# Altium PCB GRLV_Double_30v_v0.2b.PcbDoc
Units mil, origin at the board's own origin, x right, y up, seen from the top; angles counter-clockwise.
Board outline 4340 x 4860 mil, 2 copper layers (Top Layer, Bottom Layer); 84 components, 43 nets, 212 pads, 4 vias.
Unrouted connection lines stored in the file: 47.
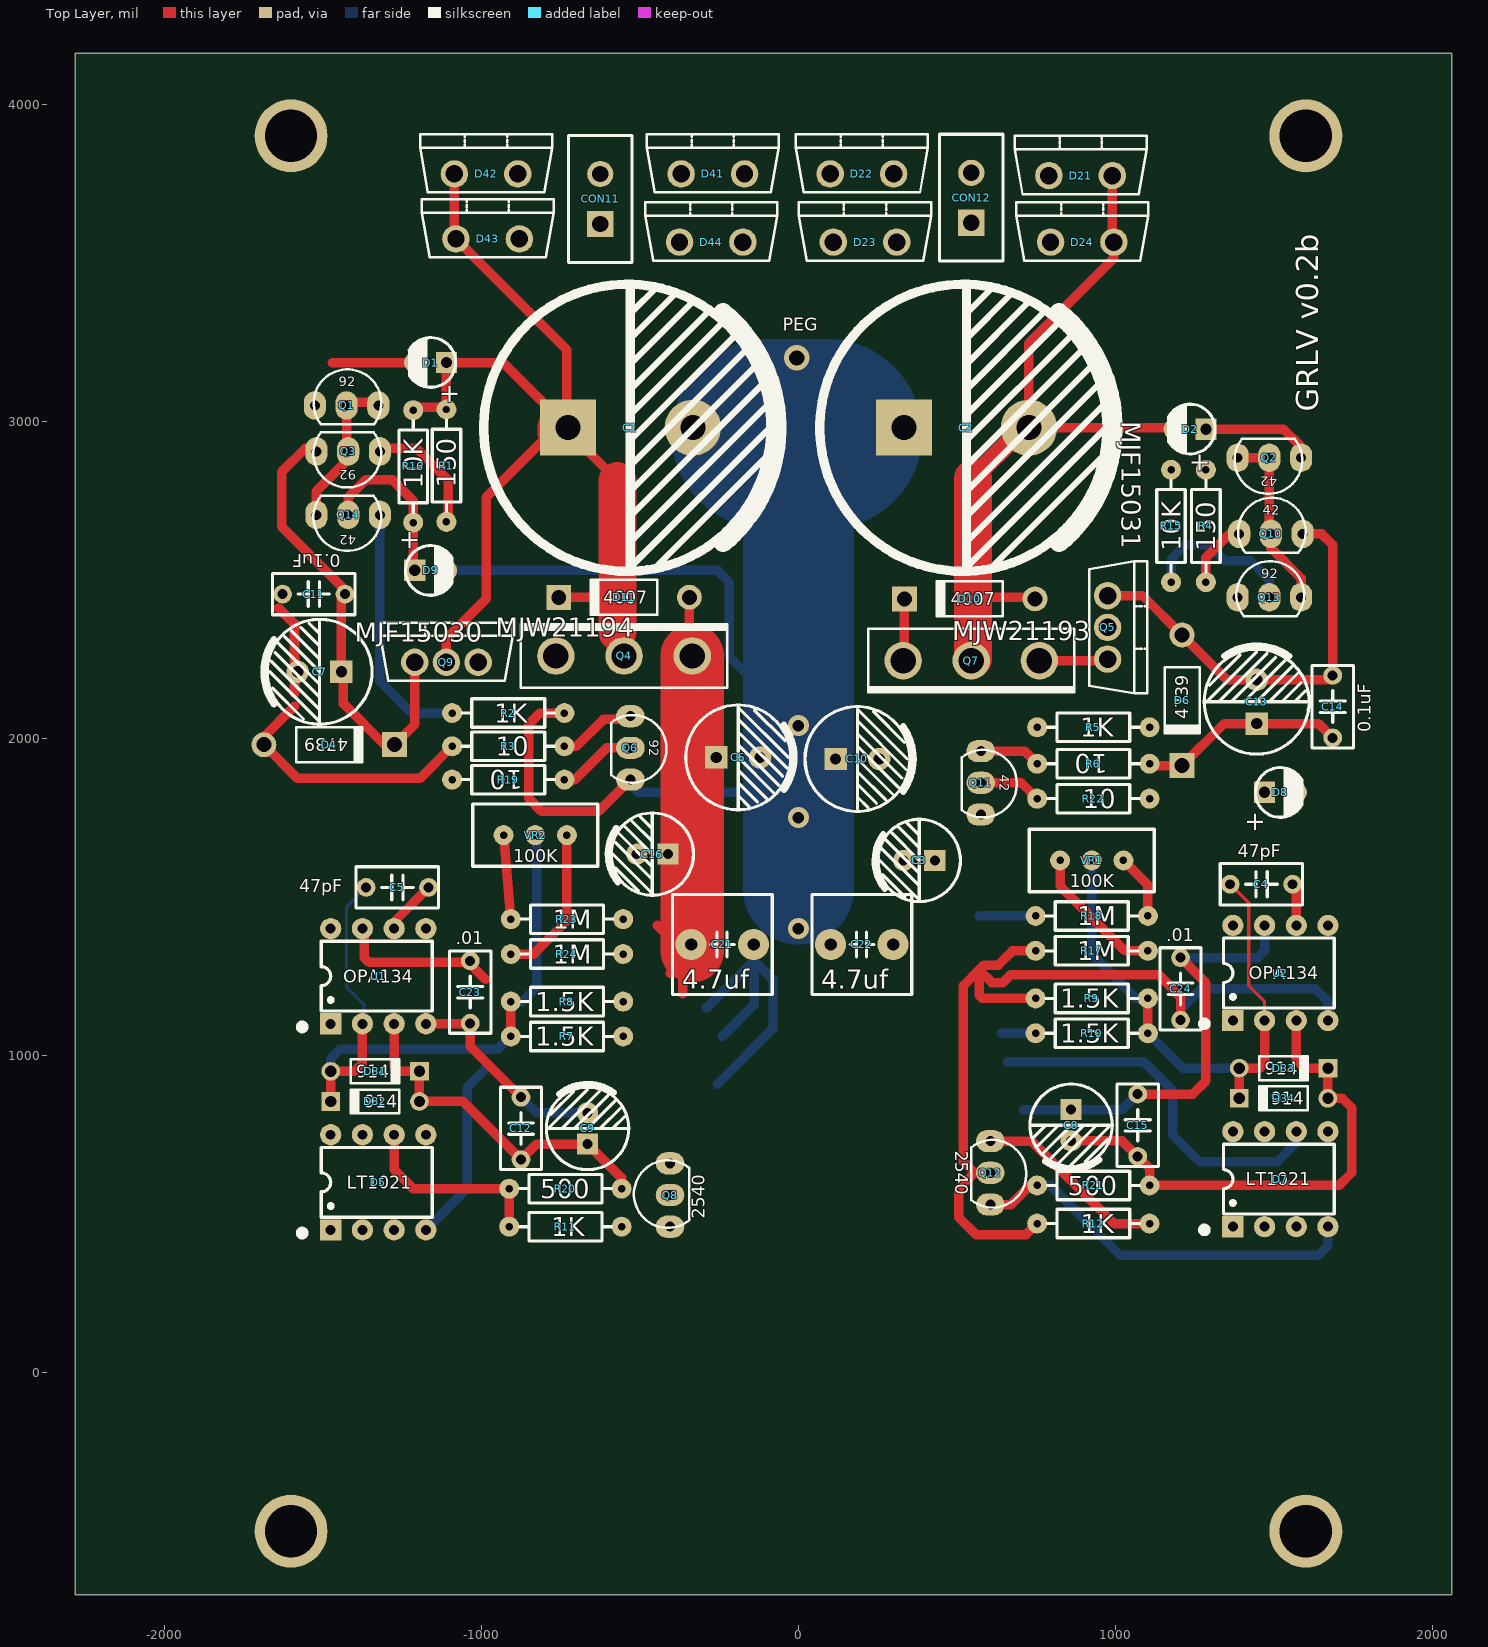
[diagram p0: Top Layer view]
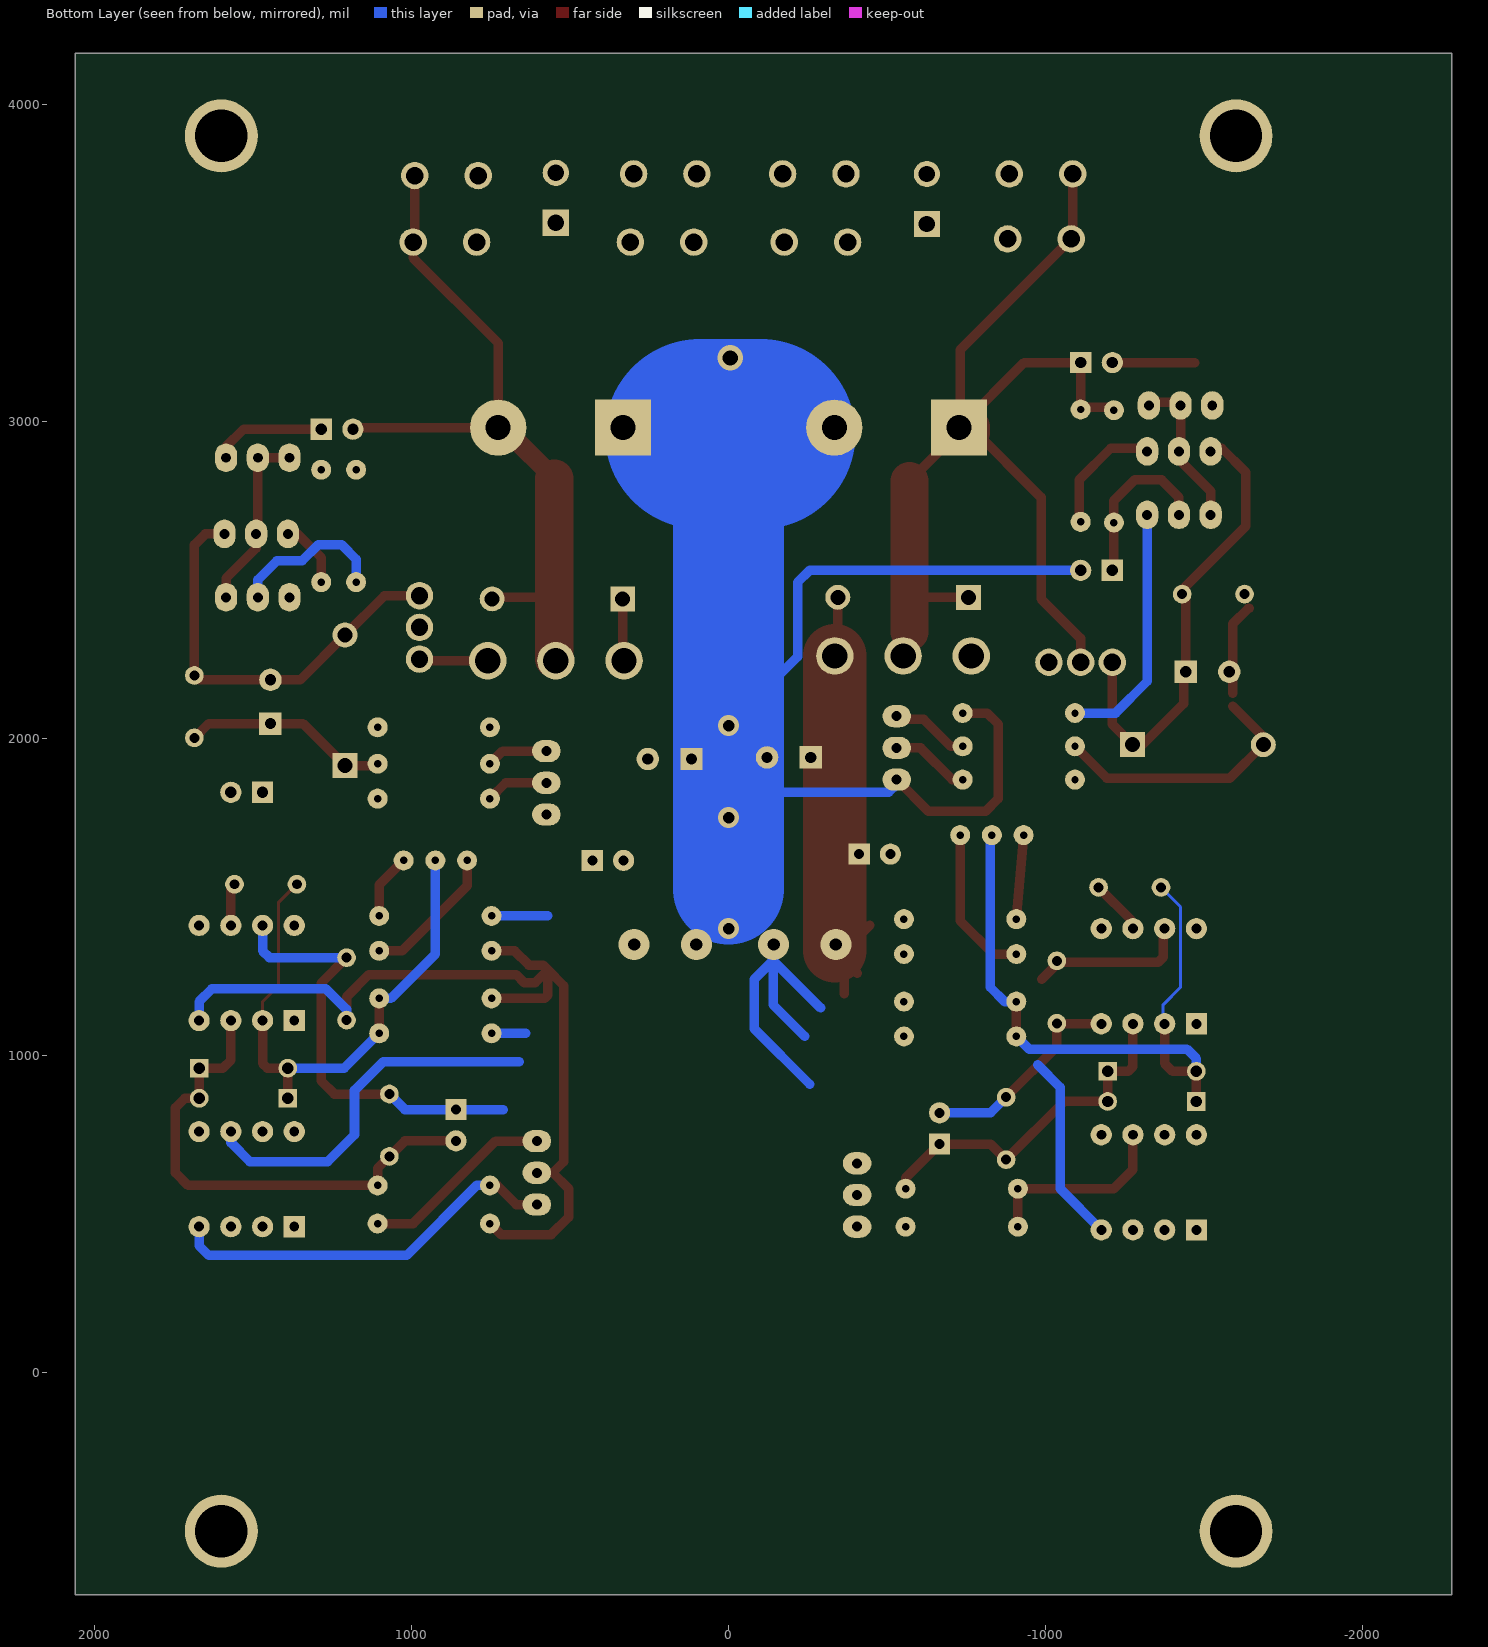
[diagram p1: Bottom Layer view, seen from below]

## Layer stack, top to bottom
Top Solder: solder mask 0.4, Solder Resist, Dk 3.5
Top Layer: signal copper 2.8
Dielectric 1: dielectric 12.6, FR-4, Dk 4.8
Bottom Layer: signal copper 2.8
Bottom Solder: solder mask 0.4, Solder Resist, Dk 3.5

## Board outline
-2280,-700 2060,-700 2060,4160 -2280,4160

## Design rules (kind name [scope] priority, off if disabled: settings)
Clearance [All] p1: gap=10 ignorepadtopadclearanceinfootprint=FALSE except(0: Arc-Hole Track-Hole SMDPad-Hole THPad-Hole Via-Hole Fill-Hole Poly-Hole Region-Hole Text-Hole)
PlaneClearance [All] p1: clearance=30
PlaneConnect [All] p1: planeconnectstyle=Relief reliefexpansion=20 reliefentries=4 reliefconductorwidth=20 reliefairgap=30
PolygonConnect [All] p1: thpad.connectstyle=Relief thpad.reliefconductorwidth=20 thpad.reliefentries=4 thpad.polygonreliefangle="45 Angle" thpad.airgapwidth=20 smdpad.connectstyle=Relief smdpad.reliefconductorwidth=20 smdpad.reliefentries=4 smdpad.polygonreliefangle="90 Angle" smdpad.airgapwidth=20 via.connectstyle=Relief via.reliefconductorwidth=20 via.reliefentries=4 via.polygonreliefangle="45 Angle" via.airgapwidth=20
RoomDefinition GRLV_double_30v_v0.2b [InComponentClass('GRLV_double_30v_v0.2b')] p1: confinementstyle=ConfineIn formatcopy=TRUE lockcomponents=FALSE outline -3835,-1602.83 -1835,-1602.83 -1835,-602.83 -3835,-602.83
RoutingVias [All] p1: holewidth=28 width=50 viastyle="Through Hole" minholewidth=28 minwidth=50 maxholewidth=28 maxwidth=50
SolderMaskExpansion [All] p1: expansion=4
Width [All] p1: maxlimit=700 minlimit=10 preferedwidth=30
28 further rules are at their usual default settings.

## Components (designator, comment, footprint, x,y, rotation, side; value= is the part's Value field where it differs from the comment)
C1 "4700UF/35V" "CAP 10*22*31.5" -530,2980 r0 top
C2 "4700UF/35V" "CAP 10*22*31.5" 530,2980 r0 top
C3 "10UF" "CAP 2.5*6.3*7" 380.79,1615 r180 top
C4 "47pF" "CBB 6.3*6.3*5" 1460,1540 r180 top
C5 "47pF" "CBB 6.3*6.3*5" -1265,1530 r180 top
C6 "220UF/35V" "CAP 3.5*8*11.5" -190,1940 r0 top
C7 "47UF" "CAP 3.5*8*11.5" -1510,2210 r180 top
C8 "47UF" "CAP 2.5*6.3*11.2" 860,780 r270 top
C9 "47UF" "CAP 2.5*6.3*11.2" -665,770 r90 top
C10 "220UF/35V" "CAP 3.5*8*11.5" 186.1,1935 r0 top
C11 "0.1uF" "CBB 6.3*6.3*5" -1528.43,2455 r180 top
C12 "0.1uF" "CBB 6.3*6.3*5" -875,770 r90 top
C13 "47UF" "CAP 3.5*8*11.5" 1445,2115.79 r90 top
C14 "0.1uF" "CBB 6.3*6.3*5" 1685,2100 r90 top
C15 "0.1uF" "CBB 6.3*6.3*5" 1070,780 r90 top
C16 "10UF" "CAP 2.5*6.3*7" -460.79,1635 r180 top
C21 "4.7uf" "CBB 7.2*7.2*13" -240,1350 r0 top
C22 "4.7uf" "CBB 7.2*7.2*13" 200,1350 r0 top
C23 ".01" "CBB 6.3*6.3*5" -1035,1200 r90 top value=0.01uF
C24 ".01" "CBB 6.3*6.3*5" 1205,1210 r270 top value=0.01uF
CON11 "AC220-2" HX4.0-2XS -625,3701.26 r90 top
CON12 "AC220-2" HX4.0-2XS 545,3705 r90 top
D1 "+" "LED 3MM-R" -1160,3185 r180 top
D2 "+" "LED 3MM-R" 1235,2975 r180 top
D4 "4739" DO-41 -1480,1980 r0 top
D5 "LT1021" DIP8-300_MH -1325,600 r90 top
D6 "4739" DO-41 1210,2120 r270 top
D7 "LT1021" DIP8-300_MH 1520,610 r90 top
D8 "+" "LED 3MM-R" 1520,1830 r0 top
D9 "+" "LED 3MM-R" -1160,2530 r0 top
D10 "4007" DO-41 540,2440 r180 top
D11 "4007" DO-41 -550,2445 r180 top
D21 "HFA08" TO220AC 790,3775 r0 top
D22 "HFA08" TO220AC 100,3780 r0 top
D23 "HFA08" TO220AC 110,3565 r0 top
D24 "HFA08" TO220AC 795,3565 r0 top
D31 "914" DO-35 -1335,950 r0 top
D32 "914" DO-35 -1335,855 r180 top
D33 "914" DO-35 1530,960 r0 top
D34 "914" DO-35 1530,865 r180 top
D41 "VS-HFA08TB60-M3" TO220AC -370,3780 r0 top
D42 "VS-HFA08TB60-M3" TO220AC -1085,3780 r0 top
D43 "VS-HFA08TB60-M3" TO220AC -1080,3575 r0 top
D44 "VS-HFA08TB60-M3" TO220AC -375,3565 r0 top
Q1 "92" TO92A -1525,3050 r90 top
Q2 "42" TO92A 1585,2885 r270 top
Q3 "92" TO92A -1320,2905 r270 top
Q4 "MJW21194" TO247V -765,2260 r0 top
Q5 "MJF15031" TO220V 975,2450 r270 top
Q6 "92" TO92A -530,2070 r0 top
Q7 "MJW21193" TO247V 760,2245 r180 top
Q8 "2540" TO92A -405,460 r180 top
Q9 "MJF15030" TO220V -1210,2240 r0 top
Q10 "42" TO92A 1390,2645 r90 top
Q11 "42" TO92A 575,1960 r0 top
Q12 "2540" TO92A 605,730 r0 top
Q13 "92" TO92A 1385,2445 r90 top
Q14 "42" TO92A -1320,2705 r270 top
R1 "150" "RS 1/4W" -1110,2860 r270 top
R2 "1K" "RS 1/4W" -915,2080 r0 top
R3 "10" "RS 1/4W" -915,1975 r0 top
R4 "150" "RS 1/4W" 1285,2670 r90 top
R5 "1K" "RS 1/4W" 930,2035 r0 top
R6 "10" "RS 1/4W" 930,1920 r0 top
R7 "1.5K" "RS 1/4W" -730,1060 r0 top
R8 "1.5K" "RS 1/4W" -730,1170 r180 top
R9 "1.5K" "RS 1/4W" 925,1180 r180 top
R10 "1.5K" "RS 1/4W" 925,1070 r0 top
R11 "1K" "RS 1/4W" -735,460 r180 top
R12 "1K" "RS 1/4W" 930,470 r180 top
R15 "10K" "RS 1/4W" 1175,2670 r90 top
R16 "10K" "RS 1/4W" -1215,2857.83 r270 top
R17 "1M" "RS 1/4W" 925,1330 r180 top
R18 "1M" "RS 1/4W" 925,1440 r0 top
R19 "10" "RS 1/4W" -915,1870 r180 top
R20 "500" "RS 1/4W" -735,580 r180 top
R21 "500" "RS 1/4W" 930,590 r180 top
R22 "10" "RS 1/4W" 930,1810 r0 top
R23 "1M" "RS 1/4W" -730,1430 r0 top
R24 "1M" "RS 1/4W" -730,1320 r180 top
U1 "OPA134" DIP8-300_MH -1325,1250 r90 top
U2 "OPA134" DIP8-300_MH 1520,1260 r90 top
VR1 "100K" "RS 1/2W-VR" 925,1615 r180 top
VR2 "100K" "RS 1/2W-VR" -830,1695 r180 top

## Footprints (in the part's own frame and the unit in brackets; to place one, negate y for a bottom-side part, rotate by r counter-clockwise, add the part's x,y. Pads: shape width x height; smd on the part's side, far side on the other; paste and mask are expansions set on the pad)
"CAP 2.5*6.3*7" [mm] "脚距2.5mm直径6.3mm高度7mm"
  rect 1.7x1.7 hole 0.8: 1(-1.25,0)
  round 1.7 hole 0.8: 2(1.25,0)
  silkscreen extent -3.3,-3.3 3.56,3.3, body extent -3.15,-3.15 3.16,3.15, height 7.03
"CAP 2.5*6.3*11.2" [mm] "脚距2.5mm直径6.3mm高度11.2mm"
  rect 1.7x1.7 hole 0.8: 1(-1.25,0)
  round 1.7 hole 0.8: 2(1.25,0)
  silkscreen extent -3.3,-3.3 3.56,3.3, body extent -3.15,-3.15 3.16,3.15, height 11.23
"CAP 3.5*8*11.5" [mm] "脚距3.5mm直径8mm高度11.5mm"
  rect 1.8x1.8 hole 0.9: 1(-1.75,0)
  round 1.8 hole 0.9: 2(1.75,0)
  silkscreen extent -4.2,-4.2 4.5,4.2, body extent -4,-4 4.01,4, height 11.53
"CAP 10*22*31.5" [mm] "脚距10mm直径22mm高度31.5mm"
  rect 4.5x4.5 hole 2: 1(-5,0)
  round 4.5 hole 2: 2(5,0)
  silkscreen extent -11.74,-11.51 11.74,11.49, body extent -11,-11 11.01,11, height 31.53
"CBB 6.3*6.3*5" [mm] "脚距5mm高6.3mm厚3mm"
  round 1.5 hole 0.8: 1(-2.5,0) 2(2.5,0)
  silkscreen extent -3.3,-1.65 3.3,1.65, body extent -3.15,-1.5 3.15,1.5, height 6.8
"CBB 7.2*7.2*13" [mm] "脚距5mm高13mm厚7.2mm"
  round 2.5 hole 1: 1(-2.5,0) 2(2.5,0)
  silkscreen extent -4,-4 4,4, body extent -4,-4 4,4, height 17.53
DIP8-300_MH [mm] "带底座 9.4*7.6*3.8(长宽高）"
  rect 1.7x1.7 hole 0.8: 1(-3.81,3.81)
  round 1.7 hole 0.8: 2(-3.81,1.27) 3(-3.81,-1.27) 4(-3.81,-3.81) 5(3.81,-3.81) 6(3.81,-1.27) 7(3.81,1.27) 8(3.81,3.81)
  silkscreen extent -4.32,-4.32 2.79,6.35, body extent -5,-5.19 5,5.19, height 7.7
DO-35 [mm] "Diode, Axial; Body 3.8 x 1.9 mm (LxDia. max), Lead Dia. 0.53 mm (max)"
  round 1.5 hole 0.9: 1(-3.55,0)
  rect 1.5x1.5 hole 0.9: 2(3.55,0)
  silkscreen extent -1.95,-0.95 2.05,0.95
DO-41 [mm] "Diode, Axial; Body 5.2 x 2.7 mm (LxDia. max), Lead Dia. 0.86 mm (max)"
  round 2 hole 1.2: 1(-5.23,0)
  rect 2x2 hole 1.2: 2(5.23,0)
  silkscreen extent -2.65,-1.4 2.75,1.4
HX4.0-2XS [mm]
  rect 2.1x2.1 hole 1.3: 1(-2,0)
  round 2.1 hole 1.3: 2(2,0)
  silkscreen extent -5.08,-2.54 5.08,2.54
"LED 3MM-R" [mm] "红色3mm直插LED"
  rect 1.7x1.7 hole 0.9: 1(-1.27,0)
  round 1.7 hole 0.9: 2(1.27,0)
  silkscreen extent -2.01,-2 1.72,1.98, body extent -1.95,-1.95 1.64,1.95, height 5.55
"RS 1/2W-VR" [mm] "直插3脚顶调可调电阻，脚距2.54mm，长10mm*宽5mm*高10mm"
  round 1.6 hole 0.6: 1(-2.54,0) 2(2.54,0) 3(0,0)
  silkscreen extent -5,-2.5 5,2.5
"RS 1/4W" [mm] "直插色环电阻，脚距9mm，直径2.3mm"
  round 1.6 hole 0.6: 1(-4.5,0) 2(4.5,0)
  silkscreen extent -3.68,-1.14 3.68,1.14, body extent -4.72,-1.16 4.73,1.16, height 2.32
TO92A [mil]
  oval 90x70 hole 31.5: 1(0,0) 2(0,-100) 3(0,-200)
  silkscreen extent -60,-209 114,4
TO220AC [mm]
  round 2.2 hole 1.397: 1(0,0) 2(5.08,0)
  silkscreen extent -2.75,-1.48 7.83,3.17
TO220V [mm]
  round 2.2 hole 1.397: 1(0,0) 2(2.54,0) 3(5.08,0)
  silkscreen extent -2.75,-1.48 7.83,3.18
TO247V [mm]
  round 3 hole 2.032: 1(0,0) 2(5.461,0) 3(10.922,0)
  silkscreen extent -2.79,-2.54 13.72,2.54

## Part data
C1 C2 C3 C6 C7 C8 C9 C10 C13 C16: library part C-CAP, "直插电解电容", BOM名称=直插电解电容, 学习资源=www.ooocke.com, 版权归属=源创客
C4 C5 C11 C12 C14 C15 C23 C24: library part C-CBB, "CBB电容", BOM名称=CBB电容, 学习资源=www.ooocke.com, 版权归属=源创客
C21 C22: library part C-MKS, "MKS薄膜电容"
D1 D2 D8 D9: library part LED, "直插式LED"
D4 D6: library part 1N4739, "9.1V/1W稳压管"
D5 D7: library part LT1021-10-2P, "10V Precision Reference 2 Pin Config"
D10 D11: library part 1N4007, "整流二极管", BOM名称=整流二极管, 学习资源=www.ooocke.com, 版权归属=源创客
D21 D22 D23 D24: library part VS-HFA08TB60-M3, "Ultrafast Soft Recovery Diado 8A 600V"
D31 D32 D33 D34: library part 1N914, "高速开关管 1V/0.25W"
D41 D42 D43 D44: "Ultrafast Soft Recovery Diado 8A 600V"
Q1 Q3 Q6 Q13: library part KSP92/93, "High Voltage PNP Transistor"
Q2 Q10 Q11 Q14: library part KSP42/43, "High Voltage NPN Transistor"
Q4 Q9: "Power NPN Transistor"
Q5 Q7: "Power PNP Transistor"
Q8 Q12: library part DN2540, "N沟道耗尽型DMOS场效应管 400V/150ma"
R1 R2 R3 R4 R5 R6 R7 R8 R9 R10 R11 R12 R15 R16 R17 R18 R19 R20 R21 R22 R23 R24: library part R-CRR, "直插色环电阻", BOM名称=色环电阻, 学习资源=www.ooocke.com, 版权归属=源创客
U1 U2: library part OPA134PA
VR1 VR2: library part VR-W, "直插可调电阻-顶调"

## Free pads (board coordinates)
  round 230 hole 165: 2(-1600,-500) 2(-1600,3900) 2(1600,-500) 2(1600,3900)

## Via types
v1: diameter 66, hole 36, Top Layer to Bottom Layer, 3 vias
v2: diameter 80, hole 48, Top Layer to Bottom Layer, 1 vias

## Nets (pads, with @x,y where several pads share a name; then routed paths per layer and width w, separated by ;. In a path a pad name is that pad's centre, name@x,y a point inside that pad or via, vN(x,y) a via of type N, cw(c..) or ccw(c..) an arc to the next point about the centre after c; other vN are vias at no path point)
GND: C1.2 C2.1 C6.2 C8.1 C9.2 C10.1 C12.2 C15.2 C21.2 C22.1 C23.1 C24.1 D5.4 D7.6 D8.1 D9.2 D22.1 D23.1 D41.2 D44.2 Q6.3 Q11.3 R2.2 R5.1 R7.2 R10.1 R18.1 R23.2 U1.4 U2.7 | length 9491.6
  Top Layer w30: U1.4 -1036.57,1100 C23.1 -1035,1028.43 C12.2 ; R2.2 -815,2080 -850,2045 -850,1810 -810,1770 -630,1770 Q6.3 ; C15.2 1243.43,878.43 1285,920 1285,1228.43 C24.1
  Bottom Layer w30: D5.4 -1045,580 -1045,900 -975,970 ; D9.2 -255,2530 -217.5,2492.5 -217.5,2257.5 v1(0,2040) ; C12.2 -825.79,819.21 C9.2 ; Q6.3@-530,1855 -505,1830 -80,1830 v1(0,1750) ; -290,1150 -140,1300 ; -255.79,909.21 -80,1085 -80,1240 -140,1300 ; -240,1060 -140,1160 -140,1300 ; 570,1440 R18.1 ; 640,1070 R10.1 ; 660,980 1090,980 1180,890 1180,750 1265,665 1510,665 1570,725 D7.6 ; 710.79,829.21 C8.1 1020.79,829.21 C15.2 ; C24.1 1448.43,1308.43 1470,1330 U2.7
  Bottom Layer w90: v1@-11.1,2040 v1(0,2040) v1@11.1,2040
  Bottom Layer w350: 0,1525 v1(0,1750) v1(0,2040) 0,2930
  Bottom Layer w600: -100,2960 90,2960
  other v1: 0,1400
  other v2: -5,3200
NetC1_1: C1.1 D1.1 D11.2 D42.1 D43.1 Q4.2 Q9.2 R1.1 R16.1 | length 3539.1
  Top Layer w30: R16.1 -1205,3045 -1117.83,3045 R1.1 D1.1 ; Q9.2 -1110,2315 -985,2440 -985,2760 C1.1@-763.39,2981.61 ; D1.1@-1095,3200 D1.1 ; D42.1 -1085,3580 D43.1 -730,3225 -730,2985 C1.1@-731.85,2985 ; C1.1@-763.39,2985 C1.1@-763.39,2981.61 ; D11.2 -570,2445 ; C1.1 C1.1@-731.85,2985 ; -570,2811.3 C1.1@-743.7,2985 ; D1.1 -931.85,3185 C1.1@-731.85,2985 ; C1.1@-763.39,2981.61 -760,2985 C1.1@-743.7,2985 ; C1.1@-743.7,2985 C1.1@-731.85,2985
  Top Layer w120: C1.1@-763.39,2965.31 C1.1@-763.39,2981.61 ; -570,2335 -570,2445 -570,2811.3
NetC2_2: C2.2 D2.2 D10.1 D21.2 D24.2 Q5.2 Q7.2 R4.2 R15.2 | length 2334.3
  Top Layer w30: 550,2445 740.91,2445 D10.1 ; D21.2 990,3570 D24.2 995,3515 726.85,3246.85 C2.2 1180,2980 D2.2
  Top Layer w60: 550,2820 C2.2@690,2960
  Top Layer w120: Q7.2@550,2250 550,2445 550,2820
NetC3_1: C3.1 C4.2 D33.1 D34.2 R9.1 R10.2 U2.2 VR1.3 | length 1771.7
  Top Layer w10: C4.2 1420,1481.57 1420,1220 1470,1170 U2.2
  Top Layer w30: VR1.3 VR1.3@930,1620 ; R10.2 R9.1 ; D34.2 D33.1 1455,960 1470,975 U2.2
  Bottom Layer w30: VR1.3 925,1320 1065,1180 R9.1 ; R10.2 1212.17,960 D33.1
NetC3_2: C3.2 C10.2 C22.2 C24.2 D10.2 Q7.3 Q12.2 R9.2 R12.2 R17.2 U2.4 | length 3198.7
  Top Layer w30: Q7.3 334.09,2249.09 D10.2 ; Q12.2 555,630 ; R9.2 580,1180 570,1190 570,1270 ; R17.2 675,1330 630,1285 585,1285 570,1270 ; R12.2 717.83,435 560,435 505,490 505,580 555,630 ; C24.2 1205,1185 1135,1255 670,1255 645,1230 610,1230 570,1270 ; 555,630 520,665 520,1220 570,1270
  Bottom Layer w30: C24.2 1205,1145 1270,1210 1630,1210 1670,1170 U2.4
NetC4_1: C4.1 R22.2 U2.6 | length 134.8
  Top Layer w30: C4.1 1570,1528.43 U2.6
NetC5_1: C5.1 R19.2 U1.6 | length 182.2
  Top Layer w30: U1.6@-1270,1400 -1270,1426.57 C5.1 ; R19.2@-1101.57,1870 R19.2
NetC5_2: C5.2 C16.2 D31.1 D32.2 R7.1 R8.2 U1.2 VR2.3 | length 2135.9
  Top Layer w30: D32.2 D31.1 -1400,950 -1375,975 U1.2 ; R7.1 R8.2
  Bottom Layer w10: U1.2@-1370,1100 -1370,1160 -1425,1215 -1425,1468.43 C5.2
  Bottom Layer w30: D31.1 -1474.76,990.24 -1445,1020 -947.17,1020 R7.1 ; R8.2 -870,1170 -825,1215 VR2.3@-825,1695
NetC6_1: C6.1 C16.1 C21.1 C23.2 D11.1 Q4.3 Q8.3 R8.1 R24.1 U1.7 | length 1993.7
  Top Layer w30: U1.7@-1370,1400 -1370,1309.21 -1354.21,1293.43 C23.2@-1040,1293.43 ; C23.2 C23.2@-1040,1293.43 ; -986.57,1240 C23.2@-1040,1293.43 ; -445,1410 C21.1@-380,1345 ; -405,1260 -365,1300 ; -385,1330 -365,1310 -365,1300 ; -365,1195 -365,1300 ; D11.1 -344.09,2269.09 Q4.3 ; C21.1@-335,1330 -365,1300
  Top Layer w100: -336.85,1300 -335,1301.85 C21.1@-335,1330
  Top Layer w200: C21.1@-335,1330 -335,1350 Q4.3
NetC7_1: C7.1 C11.1 D4.2 Q3.3 Q9.1 | length 1509.5
  Top Layer w30: Q3.3 -1530,2915 -1555,2915 -1630,2840 -1630,2668.42 -1423.29,2461.71 C11.1 -1441.1,2443.9 C7.1@-1441.1,2211.1 ; C7.1@-1452.5,2222.5 C7.1@-1441.1,2211.1 ; C7.1@-1441.1,2195 C7.1@-1435,2195 ; C7.1 C7.1@-1441.1,2211.1 ; Q9.1 -1210,2044.09 D4.2 -1305,1980 -1435,2110 C7.1@-1435,2195 ; C7.1@-1441.1,2211.1 -1440.55,2210.55 -1425,2195 C7.1@-1435,2195
NetC7_2: C7.2 C11.2 D4.1 R3.1 | length 1148.6
  Top Layer w30: D4.1@-1690.91,1965 -1690.91,1970 -1690.91,1980 -1690.91,2000 -1589.21,2101.69 ; D4.1 -1580.91,1875 -1192.17,1875 R3.1 ; -1640.91,2410 -1638.43,2410 -1589.21,2360.79 -1589.21,2141.69
NetC8_2: C8.2 C15.1 D33.2 D34.1 R21.1 U2.3 | length 1614.5
  Top Layer w30: C8.2 1020.79,730.79 C15.1 1107.17,644.41 R21.1 1705,590 1745,630 1745,835 1715,865 D34.1 D33.2 1595,960 1570,985 U2.3
NetC9_1: C9.1 C12.1 D31.2 D32.1 R20.1 U1.3 | length 1127.8
  Top Layer w30: U1.3 -1275,965 -1260,950 D31.2 D32.1 -1058.43,855 C12.1 -825.79,720.79 C9.1 -557.83,613.62 R20.1
NetC13_1: C13.1 C14.1 D6.2 R6.2 | length 654.1
  Top Layer w30: R6.2 1113.07,1914.09 D6.2 1342.8,2046.89 C13.1 1639.69,2046.89 C14.1
NetC13_2: C13.2 C14.2 D6.1 Q5.1 Q10.3 | length 1346.7
  Top Layer w30: Q5.1 1085.91,2450 D6.1 1351.22,2184.68 C13.2 1671.26,2184.68 C14.2 1685,2610 1650,2645 Q10.3
NetCON11_1: CON11.1 D43.2 D44.1
NetCON11_2: CON11.2 D41.1 D42.2
NetCON12_1: CON12.1 D23.2 D24.1
NetCON12_2: CON12.2 D21.1 D22.2
NetD1_2: D1.2 Q1.1 | length 260
  Top Layer w30: -1470,3185 D1.2
NetD2_1: D2.1 Q2.1 | length 357.8
  Top Layer w30: D2.1 1530,2975 1585,2920 Q2.1
NetD5_6: D5.6 Q8.2 R11.2 R20.2 | length 617.7
  Top Layer w30: D5.6 -1275,640 -1215,580 R20.2 R11.2
NetD7_4: D7.4 Q12.3 R21.2 | length 1268.4
  Top Layer w30: Q12.3@590,530 Q12.3 670,530 730,590 R21.2
  Bottom Layer w30: R21.2 795,590 1015,370 1640,370 1670,400 D7.4
NetD8_2: D8.2 Q13.2 R15.1 | length 503.5
  Top Layer w30: R15.1 R15.1@1177.17,2492.83
  Bottom Layer w30: R15.1 1175,2565 1220,2610 1295,2610 1345,2560 1425,2560 1485,2500 Q13.2
NetD9_1: D9.1 Q14.2 R16.2 | length 531.8
  Top Layer w30: Q14.2 -1420,2760 -1365,2815 -1280,2815 -1215,2750 R16.2 -1215,2535 D9.1
NetQ1_2: Q1.2 Q1.3 Q3.2 Q14.3 | length 499.7
  Top Layer w30: Q14.3 -1520,2780 -1425,2875 Q3.2@-1425,2885 ; Q3.2@-1420,2880 Q3.2@-1425,2885 ; Q1.3 -1335,3060 -1415,3060 Q1.2 Q3.2@-1425,2885
NetQ2_2: Q2.2 Q2.3 Q10.2 Q13.3 | length 581.4
  Top Layer w30: Q2.3 Q2.2 1485,2650 Q10.2 1490,2600 1585,2505 Q13.3
NetQ3_1: Q3.1 R1.2 | length 394.8
  Top Layer w30: Q3.1 -1310,2915 -1205,2915 -1105,2815 -1105,2687.83 R1.2
NetQ4_1: Q4.1 Q9.3 | length 0
NetQ5_3: Q5.3 Q7.1 | length 217.1
  Top Layer w30: Q7.1 970,2245 Q5.3
NetQ6_1: Q6.1 R3.2 | length 243
  Top Layer w30: R3.2 -700,1975 -615,2060 Q6.1@-530,2060
NetQ6_2: Q6.2 R19.1 | length 249.3
  Top Layer w30: R19.1 -705,1870 -605,1970 Q6.2
NetQ8_1: Q8.1 R11.1
NetQ10_1: Q10.1 R4.1 | length 213.2
  Top Layer w30: R4.1 1285,2570 1360,2645 Q10.1
NetQ11_1: Q11.1 R6.1 | length 194.4
  Top Layer w30: Q11.1 712.83,1960 R6.1
NetQ11_2: Q11.2 R22.1 | length 198.5
  Top Layer w30: Q11.2 702.83,1860 R22.1
NetQ12_1: Q12.1 R12.1 | length 609.9
  Top Layer w30: Q12.1 735,730 995,470 R12.1
NetQ13_1: Q13.1 R5.2
NetQ14_1: Q14.1 R2.1 | length 794.3
  Bottom Layer w30: Q14.1 -1320,2180 -1220,2080 R2.1
NetR17_1: R17.1 VR1.2 | length 442.1
  Top Layer w30: VR1.2 825,1535 1030,1330 R17.1
NetR18_2: R18.2 VR1.1 | length 207
  Top Layer w30: VR1.1 1102.17,1537.83 R18.2
NetR23_1: R23.1 VR2.2 | length 266
  Top Layer w30: VR2.2 R23.1
NetR24_2: R24.2 VR2.1 | length 490.7
  Top Layer w30: R24.2 -835,1320 -730,1425 VR2.1
pads on no net: D5.1 D5.2 D5.3 D5.5 D5.7 D5.8 D7.1 D7.2 D7.3 D7.5 D7.7 D7.8 U1.1 U1.5 U1.8 U2.1 U2.5 U2.8

## Silkscreen, mask and mechanical layers (free items; w line width, h text height)
Top Overlay:
  text "PEG" at -50,3285 h40
  text "GRLV v0.2b" at 1640,3030 h70 r90
Mechanical 1:
  the board outline again, w10
Drill Drawing:
  the board outline again, w10